# Altium PCB CH340T9T-R0.PcbDoc
Units mil, origin at the board's own origin, x right, y up, seen from the top; angles counter-clockwise.
Board outline 570 x 1609 mil, 2 copper layers (Top Layer, Bottom Layer); 19 components, 22 nets, 72 pads, 83 vias.
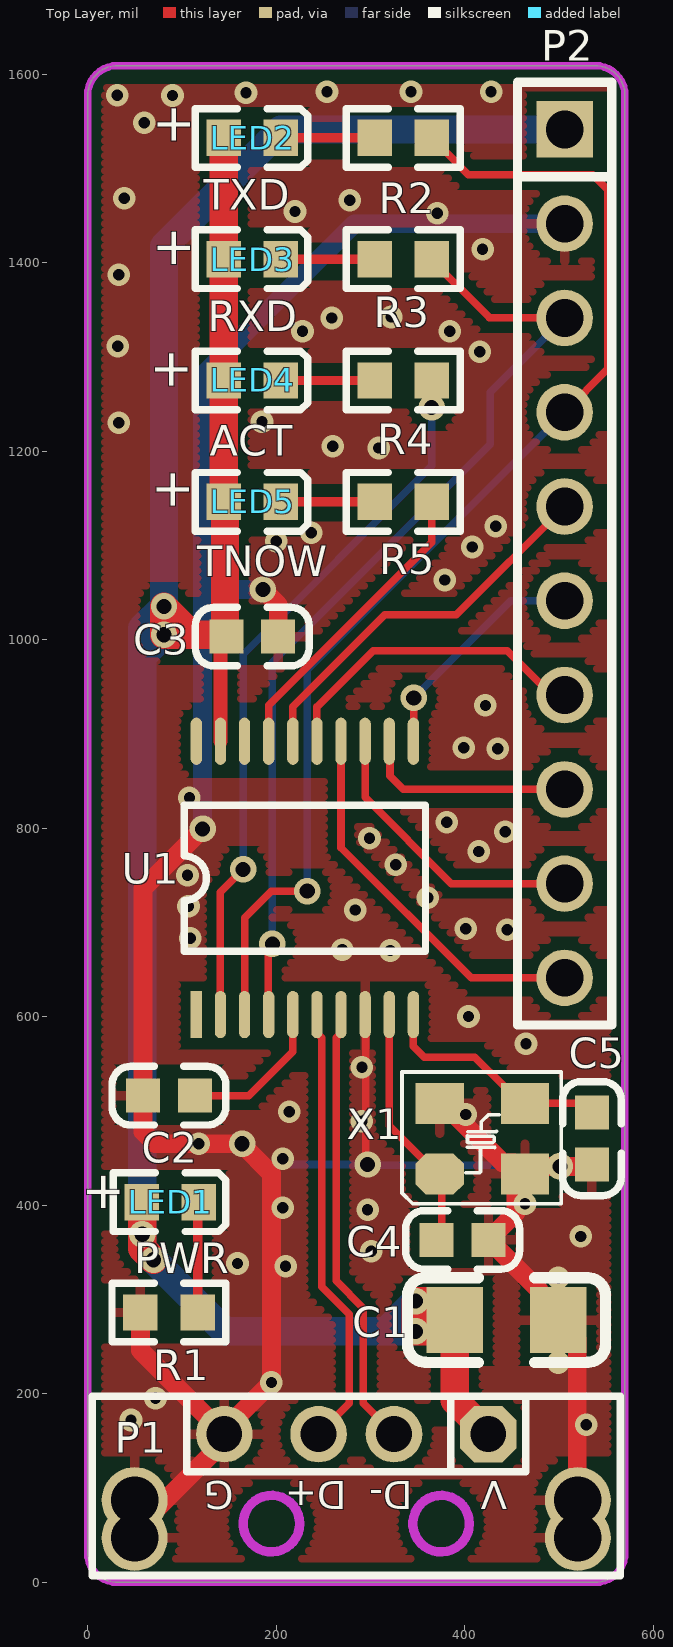
[diagram p0: Top Layer view]
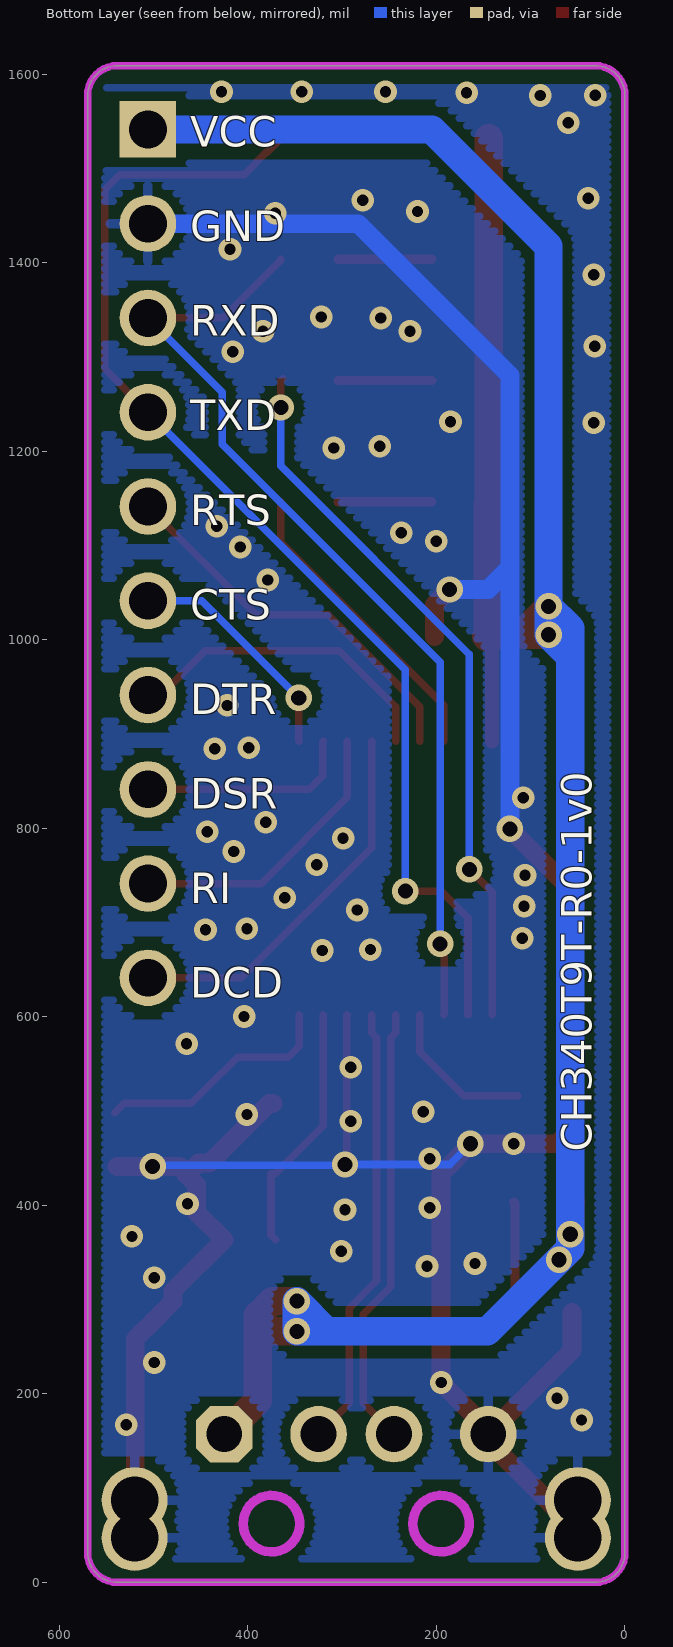
[diagram p1: Bottom Layer view, seen from below]

## Layer stack, top to bottom
Top Solder: solder mask 0.4, Solder Resist, Dk 3.5
Top Layer: signal copper 1.4
Dielectric 1: dielectric 12.6, FR-4, Dk 4.8
Bottom Layer: signal copper 1.4
Bottom Solder: solder mask 0.4, Solder Resist, Dk 3.5

## Board outline
0,31.5 ccw(c31.5,31.5) 31.5,0 538.5,0 ccw(c538.5,31.5) 570,31.5 570,1577.5 ccw(c538.5,1577.5) 538.5,1609 31.5,1609 ccw(c31.5,1577.5) 0,1577.5

## Design rules (kind name [scope] priority, off if disabled: settings)
Clearance Clearance_1 [InPolygon] p1: gap=10 ignorepadtopadclearanceinfootprint=FALSE
Clearance [All] p2: gap=6 ignorepadtopadclearanceinfootprint=FALSE
ComponentClearance [All] p1 off: gap=10 collisioncheckmode=3 verticalgap=10 showdistances=FALSE
DiffPairsRouting [All] p1: maxlimit=10 minlimit=7 mostfreqgap=8 toplayer_minwidth=6 toplayer_maxwidth=15 toplayer_prefwidth=8 bottomlayer_minwidth=6 bottomlayer_maxwidth=15 bottomlayer_prefwidth=8 maxuncoupledlength=500
MinimumSolderMaskSliver [All] p1 off: minsoldermaskwidth=10
PolygonConnect PolygonConnect_1 [IsVia] p1: connectstyle=Direct reliefconductorwidth=10 reliefentries=4 polygonreliefangle="90 Angle" airgapwidth=10
PolygonConnect [All] p2: connectstyle=Relief reliefconductorwidth=10 reliefentries=4 polygonreliefangle="90 Angle" airgapwidth=10
RoutingVias [All] p1: holewidth=16 width=28 viastyle="Through Hole" minholewidth=12 minwidth=24 maxholewidth=28 maxwidth=50
SilkToSilkClearance [All] p1 off: silktosilkclearance=10
SilkToSolderMaskClearance [IsPad] p1 off: minsilkscreentomaskgap=10 clearancetoexposedcopper=TRUE
SolderMaskExpansion [All] p1: expansion=4 istentingtop=FALSE
Width [All] p1: maxlimit=100 minlimit=6 preferedwidth=10
25 further rules are at their usual default settings.

## Classes and differential pairs
differential pair NewDifferentialPair1: +UD+ -UD-

## Components (designator, comment, footprint, x,y, rotation, side; value= is the part's Value field where it differs from the comment)
C1 "10uF" 3216_C 389.41,278.3 r180 top
C2 "0.1uF" 0603_C 113.81,516.3 r180 top
C3 "0.1uF" 0603_C 147.19,1003.3 r0 top
C4 "33p" 0603_C 370.29,363.3 r0 top
C5 "33p" 0603_C 535,498.3 r270 top
LED1 "PWR" 0603+ 57.38,403.3 r0 top
LED2 "TXD" 0603+ 144.37,1532.3 r0 top
LED3 "RXD" 0603+ 144.37,1403.63 r0 top
LED4 "ACT" 0603+ 144.37,1274.96 r0 top
LED5 "TNOW" 0603+ 144.37,1146.3 r0 top
P1 "USB" USBAM 425,157.3 r180 top
P2 "Header 10H" SIP10-2.54mm 506,1541.3 r0 top
R1 "2K" 0603 116.63,286.3 r180 top
R2 "2K" 0603 304.37,1532.3 r0 top
R3 "2K" 0603 304.37,1403.63 r0 top
R4 "2K" 0603 304.37,1274.96 r0 top
R5 "2K" 0603 304.37,1146.3 r0 top
U1 "CH340T" SSOP20 115.3,602.3 r0 top
X1 "12MHz" XT3225 373.45,433.3 r0 top

## Footprints (in the part's own frame and the unit in brackets; to place one, negate y for a bottom-side part, rotate by r counter-clockwise, add the part's x,y. Pads: shape width x height; smd on the part's side, far side on the other; paste and mask are expansions set on the pad)
0603 [mm]
  rect 0.93x0.98 smd: 1(0,0) 2(1.54,0)
  silkscreen extent -0.76,-0.79 2.3,0.79
0603+ [mm]
  rect 0.93x0.98 smd: 1(0,0) 2(1.54,0)
  silkscreen extent -0.76,-0.79 2.27,0.79
0603_C [mil]
  rect 36x36 smd: 1(0,0) 2(55,0)
  silkscreen extent -33,-31 88,31
3216_C [mil]
  rect 60x70 smd: 1(0,0) 2(-110,0)
  silkscreen extent -160,-45 50,45
SIP10-2.54mm [mil]
  rect 60x60 hole 40: 1(0,0)
  round 60 hole 40: 2(0,-100) 3(0,-200) 4(0,-300) 5(0,-400) 6(0,-500) 7(0,-600) 8(0,-700) 9(0,-800) 10(0,-900)
  silkscreen extent -50,-950 50,50
SSOP20 [mil]
  rect 12x50 smd: 1(0,0)
  oval 12x50 smd: 2(25.6,0) 3(51.2,0) 4(76.8,0) 5(102.4,0) 6(128,0) 7(153.5,0) 8(179.1,0) 9(204.7,0) 10(230.3,0) 11(230.3,290) 12(204.7,290) 13(179.1,290) 14(153.5,290) 15(128,290) 16(102.4,290) 17(76.8,290) 18(51.2,290) 19(25.6,290) 20(0,290)
  silkscreen extent -13,67 243,222
USBAM [mil]
  round 70 hole 50: 0(-95,70) 0(-95,110) 0(375,70) 0(375,110)
  oct 60x60 hole 38: 1(0,0)
  round 60 hole 38: 2(100,0) 3(180,0) 4(280,0)
  Keep-Out Layer circle w10: c50,95 r30
  Keep-Out Layer circle w10: c230,95 r30
  silkscreen extent -140,-40 420,150
XT3225 [mm]
  oct 1.3x1.1 smd: 1(0,0)
  rect 1.3x1.1 smd: 2(2.3,0) 3(2.3,1.9) 4(0,1.9)
  silkscreen extent -1.02,-0.8 3.27,2.74

## Part data
C1 C2 C3 C4 C5: library part CAP, "Capacitor"
LED1 LED2 LED3 LED4 LED5: library part LED2, "Typical RED, GREEN, YELLOW, AMBER GaAs LED"
P2: "Header, 10-Pin, Right Angle", LatestRevisionDate=17-Jul-2002, LatestRevisionNote="Re-released for DXP Platform.", Publisher="Altium Limited"
R1 R2 R3 R4 R5: library part Res2, "Resistor"
U1: "USB to TTL Serial / UART,  USB to IrDA"
X1: library part CRYSTAL, "Crystal"

## Via types
v1: diameter 24, hole 12, Top Layer to Bottom Layer, 67 vias
v2: diameter 28, hole 16, Top Layer to Bottom Layer, 16 vias

## Nets (pads, with @x,y where several pads share a name; then routed paths per layer and width w, separated by ;. In a path a pad name is that pad's centre, name@x,y a point inside that pad or via, vN(x,y) a via of type N, cw(c..) or ccw(c..) an arc to the next point about the centre after c; other vN are vias at no path point)
ACT: R4.2 U1.2 | length 768.3
  Top Layer w8: U1.2 140.9,732.2 v2(165,756.3) ; R4.2@363,1276.96 R4.2 v2(365,1246.3)
  Bottom Layer w8: v2(165,756.3) 165,984.3 365,1184.3 v2(365,1246.3)
CTS: P2.6 U1.11 | length 248.8
  Top Layer w8: U1.11 345.8,892.5 345.8,938.1 v2(346,938.3)
  Bottom Layer w8: v2(346,938.3) 449,1041.3 P2.6
DCD: P2.10 U1.14 | length 407.2
  Top Layer w8: U1.14 268.8,779.5 407,641.3 P2.10
DSR: P2.8 U1.12 | length 228.2
  Top Layer w8: U1.12 320.77,891.53 320.77,855.53 328,848.3 335,841.3 P2.8
DTR: P2.7 U1.15 | length 343.2
  Top Layer w8: U1.15 243.3,928.6 303,988.3 445.26,988.3 492.26,941.3 P2.7
GND: C1.2 C2.2 C3.2 C4.2 C5.2 P1.0 P1.4 P2.2 R1.2 U1.8 X1.2 X1.4 | length 3285.5
  Top Layer w8: U1.8 295.17,601.53 295.17,445.13 v2(297,443.3)
  Top Layer w20: P1.0@50,47.3 50,54.8 145,149.8 P1.4 ; R1.2 56,246.3 P1.4 ; v2(122,799.3) 58.81,736.11 C2.2 58.81,478.11 71.61,465.3 v2(164,465.3) 164,464.51 195,433.51 v1(195,212.01) 145,162.01 P1.4 ; v2(186,1053.3) 202.19,1037.11 C3.2 ; X1.4 377.39,508.1 440.54,444.95 452.35,444.95 X1.2 472,441.3 v2(501,441.3) C5.2@539,441.3 ; X1.2@466,433.3 454.5,421.8 454.5,392.51 C4.2 479.41,309.18 479.41,298.3 C1.2 519.41,258.3 519.41,87.89 P1.0@520,87.3
  Bottom Layer w8: v2(164,465.3) 186,443.3 v2(297,443.3) 298,442.3 500,442.3 v2(501,441.3)
  Bottom Layer w20: v2(122,799.3) 122,1076.3 ; v2(186,1053.3) 145,1053.3 122,1076.3 ; P2.2 283,1441.3 122,1280.3 122,1076.3
  other v1: 529,167.3 46,172.3 72,195.3 499.41,233.3 499.41,323.3 210,335.3 159,338.3 301,351.3 523,367 297,395.3 207,397.3 464,401.64 207,449.3 117.81,465.3 291,489.3 401,496.3 214,499.3 291,546.3 465,571.3 404,600.3 321,670.3 270,671.3 109,683.3 445,692.3 401,693.3 284,713.3 107,717.3 361,726.3 106,750.3 327,761.3 415,775.3 299,789.3 443,796.3 381,806.3 108,832.3 435,884.3 399,885.3 422,930.3 379,1063.3 408,1098.3 200,1104.3 237.31,1113.3 433,1120.3 309,1203.3 260,1205.3 33,1230.3 185,1231.3 416,1305.3 32,1311.3 228,1327.3 384,1327.3 259,1341.3 322,1342.3 33,1387.3 419,1414.3 371,1452.3 220,1454.3 278,1466.3 39,1468.3 60,1548.3 31.5,1577.5 90,1577.3 168,1580.3 254,1581.3 343,1581.3 428,1581.3
NetC2_1: C2.1 U1.5 | length 162.5
  Top Layer w8: C2.1 171,516.3 217.7,563 U1.5
NetC4_1: C4.1 U1.9 X1.1 | length 266.7
  Top Layer w8: U1.9 320,484.3 371,433.3 375.45,433.3 375.45,368.46 C4.1
NetC5_1: C5.1 U1.10 X1.3 | length 258.2
  Top Layer w8: U1.10 345.6,568.7 357,557.3 410.87,557.3 442.41,525.76 460.06,508.1 531.2,508.1 C5.1@541,498.3
NetLED1_2: LED1.2 R1.1 | length 117.6
  Top Layer w10: R1.1 116.63,401.92 LED1.2
NetLED2_2: LED2.2 R2.1 | length 99.4
  Top Layer w10: LED2.2 R2.1
NetLED3_2: LED3.2 R3.1 | length 99.4
  Top Layer w10: LED3.2 R3.1
NetLED4_2: LED4.2 R4.1 | length 99.4
  Top Layer w10: LED4.2 R4.1
NetLED5_2: LED5.2 R5.1 | length 99.4
  Top Layer w10: LED5.2 R5.1
RI: P2.9 U1.13 | length 308.9
  Top Layer w8: U1.13 294.4,832.9 386,741.3 P2.9
RTS: P2.5 U1.16 | length 412.9
  Top Layer w8: U1.16 217.7,929 315,1026.3 391,1026.3 P2.5
RXD: P2.3 R3.2 U1.4 | length 1036.9
  Top Layer w8: U1.4 191.55,602.85 191.55,672.85 v2(196,677.3) ; R3.2 365,1402.65 426.35,1341.3 P2.3
  Bottom Layer w8: v2(196,677.3) 196,976.3 427,1207.3 427,1262.3 P2.3
TNOW: R5.2 U1.17 | length 325.6
  Top Layer w8: U1.17 192.1,930.4 365,1103.3 R5.2
TXD: P2.4 R2.2 U1.3 | length 1267.3
  Top Layer w8: U1.3 166.5,704.8 195,733.3 v2(233,733.3) ; R2.2 365,1531.31 379.31,1517.01 380.29,1517.01 404,1493.3 536,1493.3 552,1477.3 552,1287.3 P2.4
  Bottom Layer w8: v2(233,733.3) 233,968.3 P2.4
UD+: P1.3 U1.6 | length 472.6
  Top Layer w8: U1.6 243.3,583.03 248.55,577.78 248.55,313.54 277.5,284.59 277.5,189.8 P1.3
UD-: P1.2 U1.7 | length 472.6
  Top Layer w8: U1.7 268.8,583.03 263.55,577.78 263.55,319.75 292.5,290.8 292.5,189.8 P1.2
VCC: C1.1 C3.1 LED1.1 LED2.1 LED3.1 LED4.1 LED5.1 P1.1 P2.1 U1.19 | length 3183.1
  Top Layer w15: U1.19 140.9,997.01 146.19,1002.3 C3.1
  Top Layer w30: LED1.1 58,402.68 v2(58,369.3) 58,354.3 v2(70,342.3) ; v2(81,1035.3) v2@81,1034.39 ; LED2.1 LED3.1 LED4.1 LED5.1 145.78,1144.89 145.78,1004.71 C3.1 ; C3.1@146.19,1002.3 141.19,1007.3 139.19,1005.3 110.1,1005.3 ; P1.1 389.41,192.89 C1.1 ; v2@81,1034.39 110.1,1005.3 ; v2@81,1034.39 v2(81,1005.3) 110.1,1005.3 ; C1.1 377.41,266.3 v2(348,266.3) v2(348,298.3) 374.41,298.3 389.41,283.3 C1.1
  Bottom Layer w30: 198,266.3 146,266.3 ; P2.1 205,1541.3 81,1417.3 v2(81,1035.3) ; 58,982.3 58,1012.3 v2(81,1035.3) ; 58,982.3 v2(58,369.3) 58,354.3 v2(70,342.3) 146,266.3 ; 58,982.3 v2(81,1005.3) v2(81,1035.3) ; 146,266.3 316,266.3 ; 316,266.3 v2(348,298.3) v2(348,266.3) 316,266.3
pads on no net: U1.1 U1.18 U1.20

## Polygon pours and split planes (outlines as drawn)
GND on Top Layer "GND_L" (hatched Horizontal grid 8 track 8, remove dead copper, pour order 0): -6,1608.3 -6,6.3 567,6.3 567,1614.3
GND on Bottom Layer "GND_L" (hatched Horizontal grid 8 track 8, remove dead copper, pour order 1): 572,1617.3 -1,1617.3 -1,4.3 571,4.3

## Keep-outs
Keep-Out Layer:
  the board outline again, w8

## Silkscreen, mask and mechanical layers (free items; w line width, h text height)
Bottom Overlay:
  text "VCC" at 461,1523 h32
  text "GND" at 461,1422.67 h32
  text "RXD" at 461,1322.33 h32
  text "TXD" at 461,1222 h32
  text "RTS" at 461,1121.67 h32
  text "CTS" at 461,1021.33 h32
  text "DTR" at 461,921 h32
  text "DSR" at 461,820.67 h32
  text "RI" at 461,720.33 h32
  text "DCD" at 461,620 h32
  text "CH340T9T-R0-1v0" at 35,457 h32 r270
Mechanical 1:
  the board outline again, w8

## Text inside footprints (layer, text, board x,y; h text height)
LED1: Top Overlay "+" at 34,391 h40 r90
LED2: Top Overlay "+" at 109,1523.3 h40 r90
LED3: Top Overlay "+" at 109,1392.3 h40 r90
LED4: Top Overlay "+" at 106,1263.3 h40 r90
LED5: Top Overlay "+" at 108,1136.3 h40 r90
P1: Top Overlay "D-" at 345,107.3 h30 r180; Top Overlay "D+" at 275,107.3 h30 r180; Top Overlay "V" at 445,107.3 h30 r180; Top Overlay "G" at 155,107.3 h30 r180